# EAGLE board HackflightBrushed (EAGLE 7.7.0)
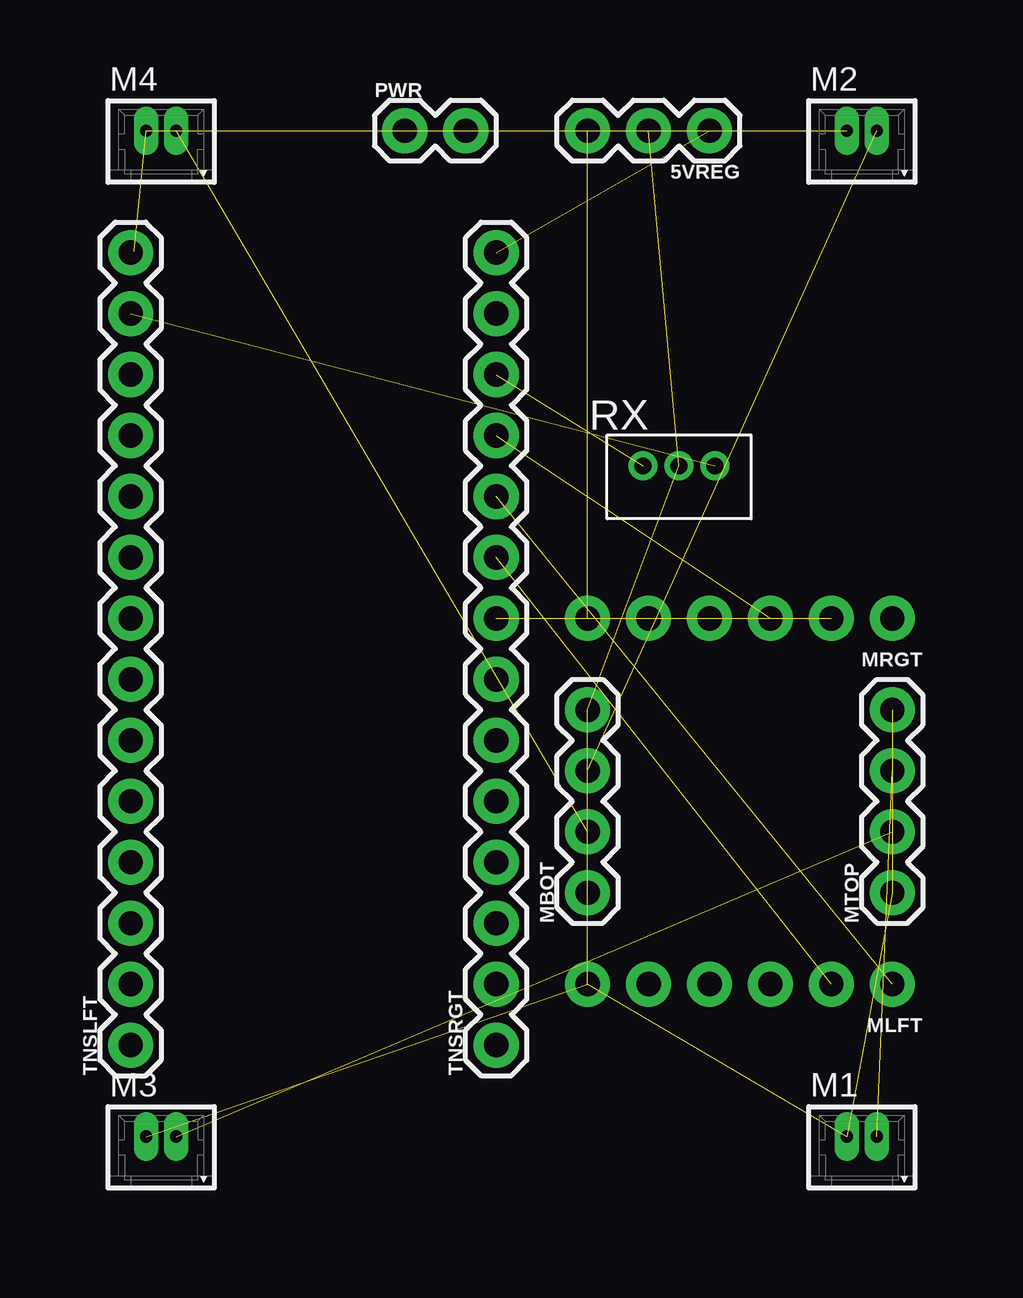
[diagram p0: board, top side]
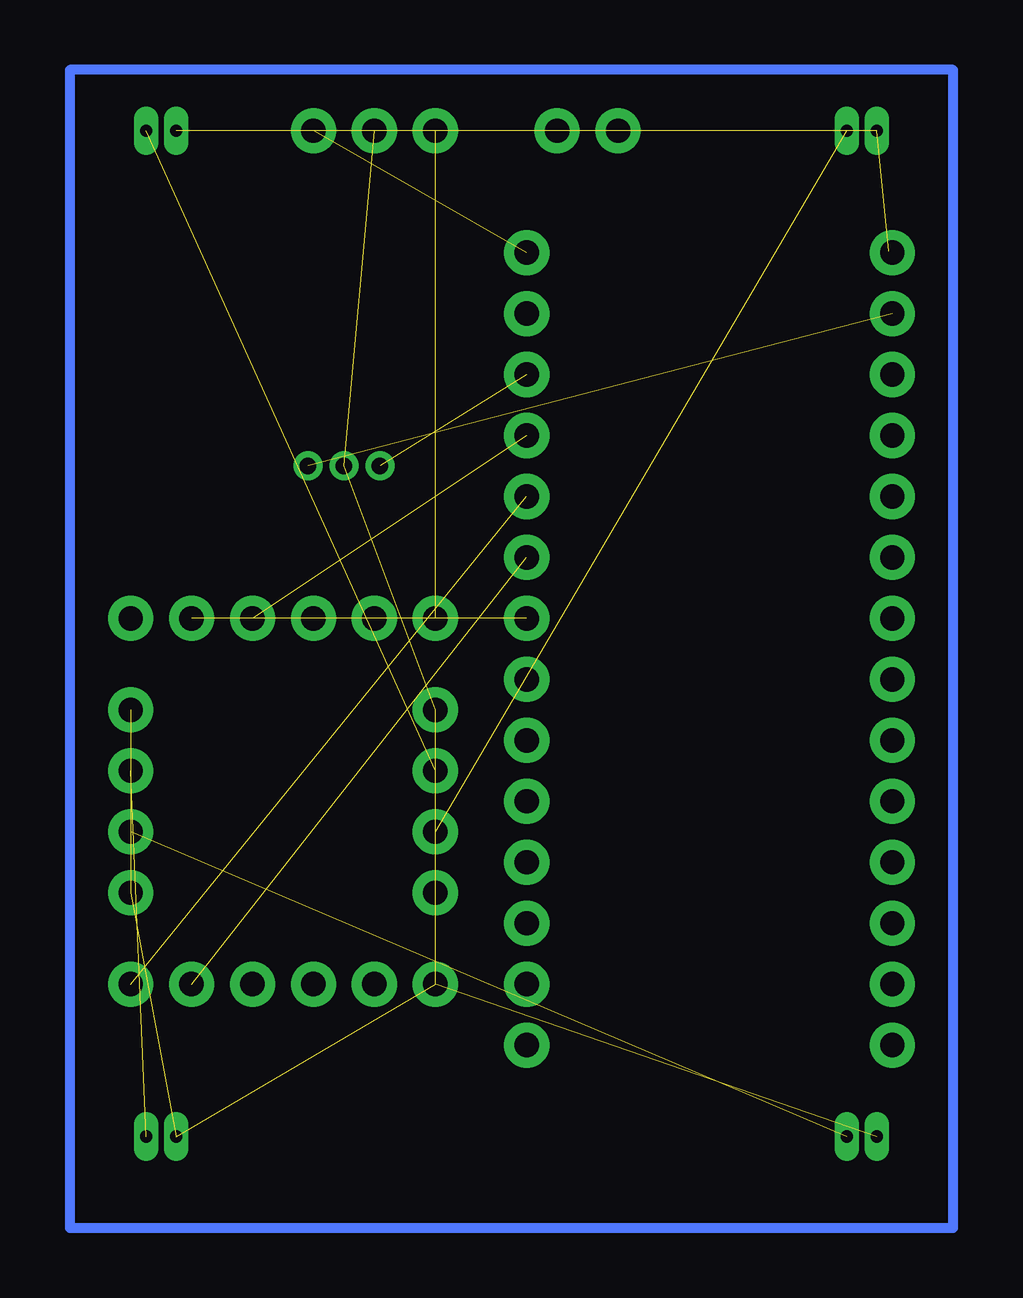
[diagram p1: board, bottom side, seen from below]

No outline drawn. Coordinates in mm, seen from the top.
Copper layers (1*16): Top 0.035mm / dielectric 1.5mm / Bottom 0.035mm
Design rules "default": minimum track width 10mil, minimum drill 24mil, track to track 8mil, track to pad 8mil, pad to pad 8mil, via to via 8mil, smd to smd 8mil, copper to edge 40mil, drill to drill 8mil, minimum pad ring 10mil, minimum via ring 8mil, stop-mask expansion 4mil, vias tented up to drill 0mil, thermal gap 10mil

## Footprints (pad centres in the part's own frame; a part is rotated, then mirrored left to right if it is on the bottom)
1X03 = drill 1.016 pad 1.88: 1 0,0; 2 2.54,0; 3 5.08,0
53047-0210 = drill 0.508 long: 1 0.625,0; 2 -0.625,0
1X04 = drill 1.016 pad 1.88: 1 0,0; 2 2.54,0; 3 5.08,0; 4 7.62,0
1X06_NO_SILK = drill 1.016 pad 1.88: 1 0,0; 2 2.54,0; 3 5.08,0; 4 7.62,0; 5 10.16,0; 6 12.7,0
1X02 = drill 1.016 pad 1.88: 1 0,0; 2 2.54,0
B3B-ZR = drill 0.7 pad 1.1: 1 -1.5,0; 2 0,0; 3 1.5,0
1X14 = drill 1.016 pad 1.88: 1 0,0; 2 2.54,0; 3 5.08,0; 4 7.62,0; 5 10.16,0; 6 12.7,0; 7 15.24,0; 8 17.78,0; 9 20.32,0; 10 22.86,0; 11 25.4,0; 12 27.94,0; 13 30.48,0; 14 33.02,0

## Placement (x,y rotation side)
5VREG  [1X03]  77.47,45.72 180 top
M1  53047-0210  [53047-0210]  83.82,3.81 0 top
M2  53047-0210  [53047-0210]  83.82,45.72 0 top
M3  53047-0210  [53047-0210]  54.61,3.81 0 top
M4  53047-0210  [53047-0210]  54.61,45.72 0 top
MBOT  [1X04]  72.39,13.97 90 top
MLFT  [1X06_NO_SILK]  85.09,10.16 180 top
MRGT  [1X06_NO_SILK]  85.09,25.4 180 top
MTOP  [1X04]  85.09,13.97 90 top
PWR  [1X02]  64.77,45.72 0 top
RX  B3B-ZR  [B3B-ZR]  76.2,31.75 0 top
TNSLFT  [1X14]  53.34,7.62 90 top
TNSRGT  [1X14]  68.58,7.62 90 top

## Library data of the parts
5VREG PWR TNSLFT TNSRGT = SparkFun-Connectors
M1-M4 = con-molex-picoblade
MBOT MTOP = SparkFun-Connectors; PROD_ID: CONN-09696
MLFT MRGT = SparkFun-Connectors; PROD_ID: CONN-08437
RX = jst

## Nets
3.3V: RX.1 TNSRGT.12
5VREG: 5VREG.1 TNSRGT.14
GND: 5VREG.2 M1.2 M2.2 M3.2 M4.2 MBOT.1 MBOT.4 MLFT.6 MTOP.1 MTOP.4 PWR.1 RX.2 TNSLFT.14
M1+: M1.1 MTOP.3
M1PWM: MRGT.2 TNSRGT.8
M2+: M2.1 MBOT.3
M2PWM: MLFT.2 TNSRGT.9
M3+: M3.1 MTOP.2
M3PWM: MLFT.1 TNSRGT.10
M4+: M4.1 MBOT.2
M4PWM: MRGT.3 TNSRGT.11
N$2: MRGT.5
RX1: RX.3 TNSLFT.13
VBAT: 5VREG.3 MRGT.6 PWR.2

## Tracks (layer width: path | path; a pad name or v marks a point on that pad's centre or on a via)
3.3V  (1 unrouted)
5VREG  (1 unrouted)
  Top 0.254: 68.58,40.46 TNSRGT.14
GND  (12 unrouted)
  Top 0.254: 53.49,40.69 TNSLFT.14
M1+  (1 unrouted)
M1PWM  (1 unrouted)
M2+  (1 unrouted)
M2PWM  (1 unrouted)
M3+  (1 unrouted)
M3PWM  (1 unrouted)
M4+  (1 unrouted)
M4PWM  (1 unrouted)
N$1
  Bottom 0.406: 50.8,48.26 87.63,48.26 87.63,0 50.8,0 50.8,48.26
RX1  (1 unrouted)
VBAT  (2 unrouted)